# Altium PCB Banker_VHDCI_2_EDGE _BUF.PCBDOC (part 1 of 2)
Units mm, origin at the board's own origin, x right, y up, seen from the top; angles counter-clockwise.
Board outline 45 x 72.8 mm, 2 copper layers (Top, Bot), stack 1.571 mm thick; 106 components, 110 nets, 426 pads, 220 vias.
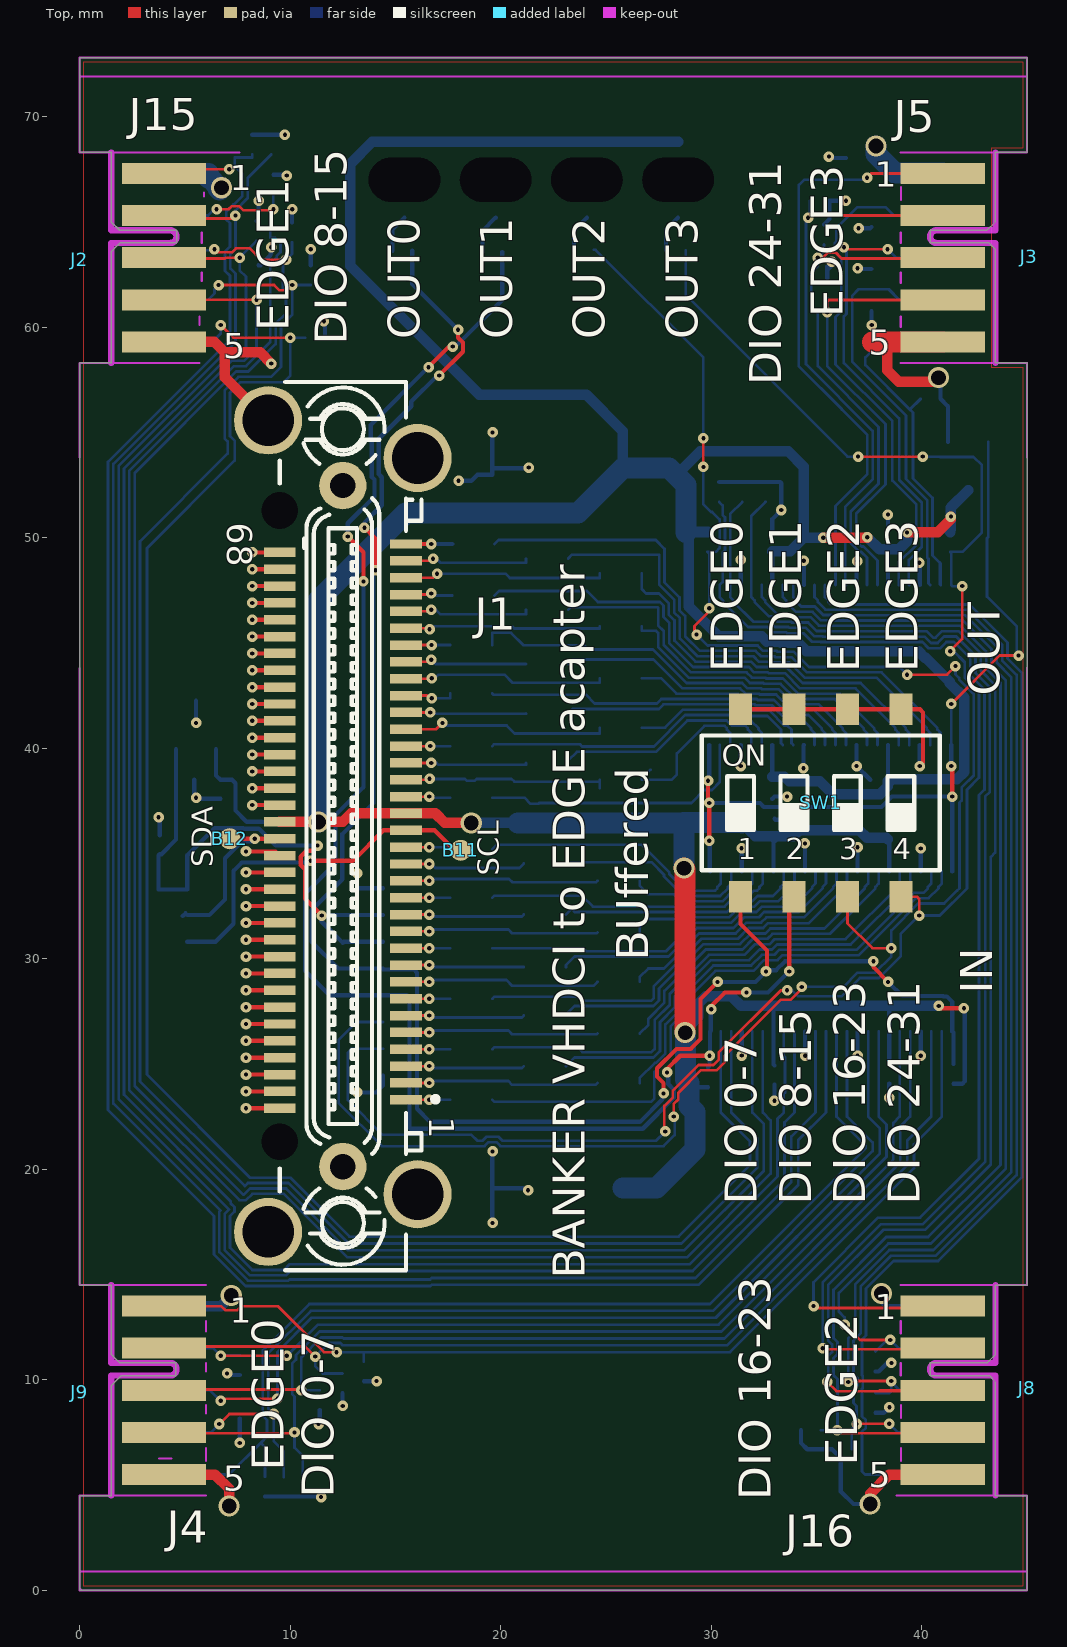
[diagram p0: Top view]
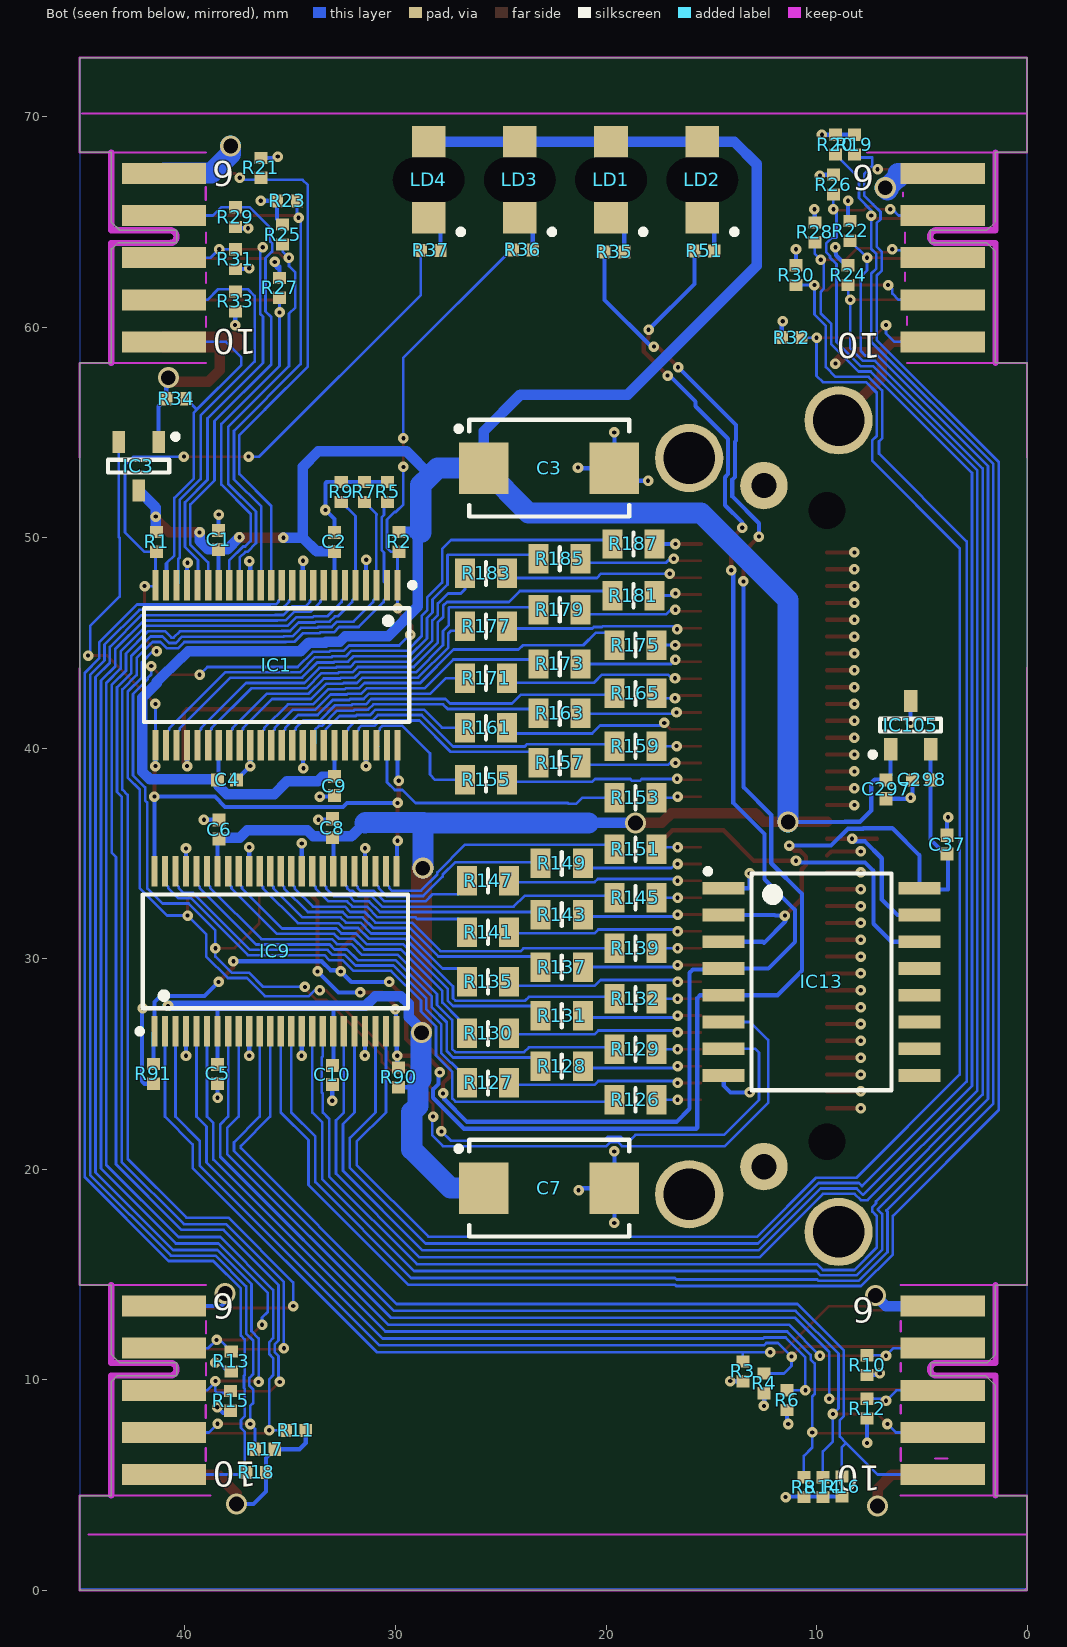
[diagram p1: Bot view, seen from below]
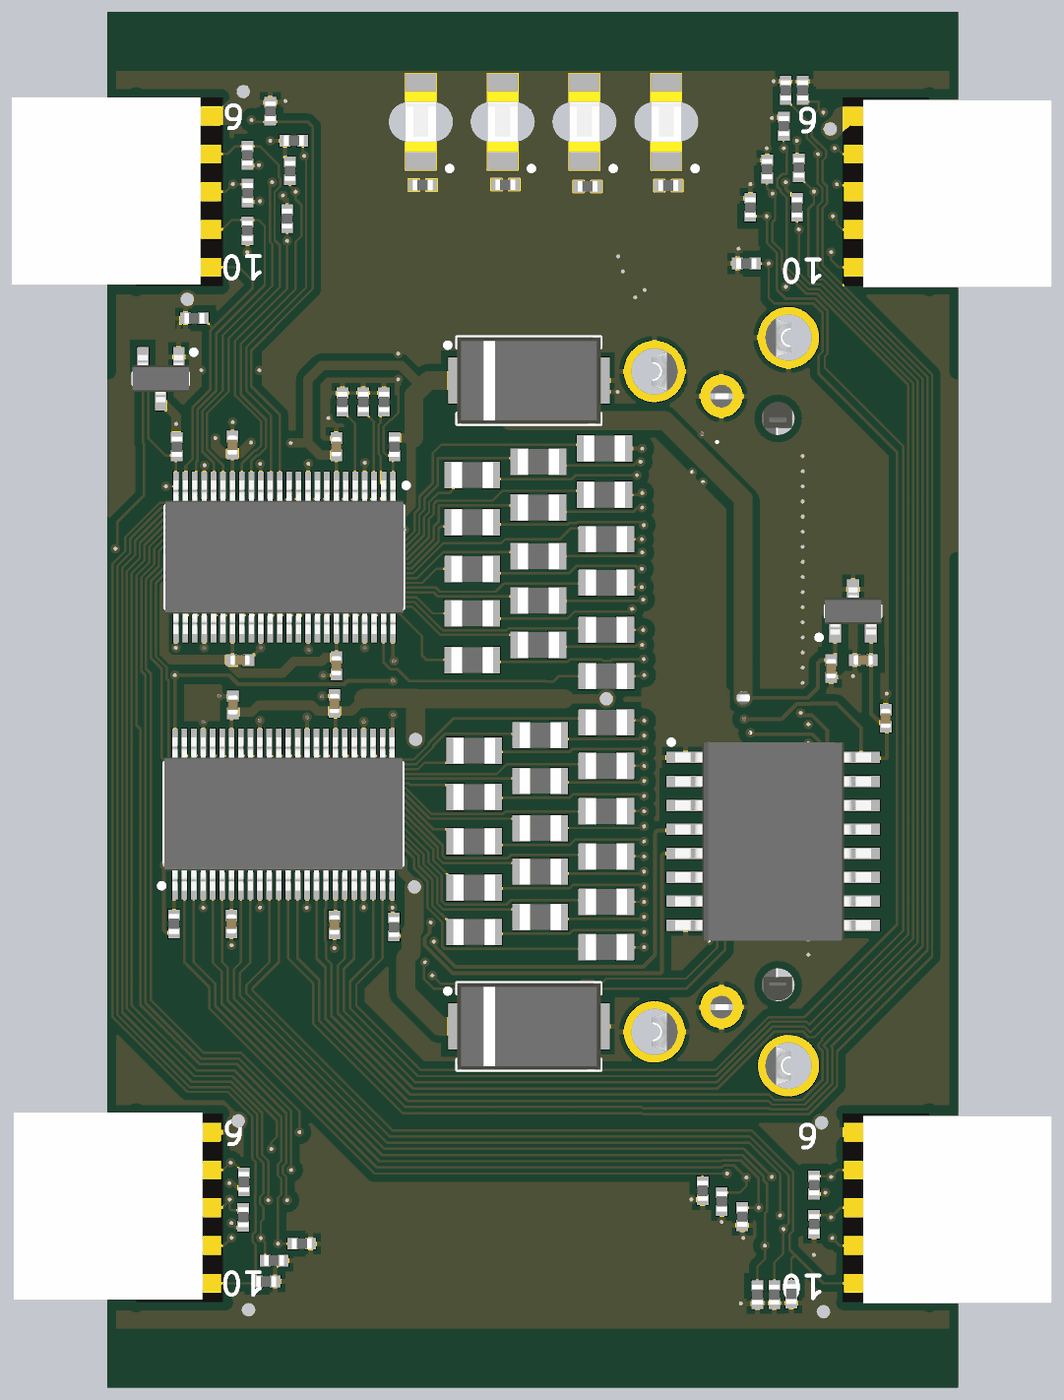
[diagram p3: 3D render of the assembled board from below, using the file's embedded part models]

## Layer stack, top to bottom
TopSolder: solder mask 0.0102, Solder Resist, Dk 3.5
Top: signal copper 0.0356
Dielectric1: core 1.5, FR-4, Dk 4.8
Bot: signal copper 0.0356
BottomSolder: solder mask 0.0102, Solder Resist, Dk 3.5

## Board outline
0,4.5 1.5,4.5 1.5,9.725 1.975,10.2 4.572,10.2 4.572,10.8 1.9,10.8 1.5,11.2 1.5,14.5 0,14.5 0,43.8 0,58.3 1.5,58.3 1.5,63.6 1.9,64 4.6,64 4.6,64.6 1.9,64.6 1.5,65 1.5,68.3 0,68.3 0,72.8 45,72.8 45,68.3 43.5,68.3 43.5,65 43.1,64.6 40.4,64.6 40.4,64 43.2,64 43.4,63.8 43.5,63.7 43.5,58.3 45,58.3 45,53.8 45,14.5 43.5,14.5 43.5,11.2 43.1,10.8 40.4,10.8 40.4,10.2 43.2,10.2 43.5,9.9 43.5,4.5 45,4.5 45,0 0,0

## Design rules (kind name [scope] priority, off if disabled: settings)
Clearance Clearance_DIFF [(InDifferentialPairClass('All Differential Pairs'))] p1: gap=0.127 ignorepadtopadclearanceinfootprint=FALSE except(0: Arc-Hole Track-Hole SMDPad-Hole THPad-Hole Via-Hole Fill-Hole Poly-Hole Region-Hole Text-Hole; 0.254: Arc-Poly Track-Poly SMDPad-Poly THPad-Poly Via-Poly Fill-Poly Poly-Poly Poly-Region Poly-Text)
Clearance [All] p2: gap=0.127 ignorepadtopadclearanceinfootprint=FALSE except(0: Arc-Hole Track-Hole SMDPad-Hole THPad-Hole Via-Hole Fill-Hole Poly-Hole Region-Hole Text-Hole; 0.381: Arc-Poly Track-Poly SMDPad-Poly THPad-Poly Via-Poly Fill-Poly Poly-Poly)
DiffPairsRouting [All] p1: maxlimit=0.254 minlimit=0.127 mostfreqgap=0.127 toplayer_minwidth=0.127 toplayer_maxwidth=0.381 toplayer_prefwidth=0.254 bottomlayer_minwidth=0.127 bottomlayer_maxwidth=0.381 bottomlayer_prefwidth=0.254 maxuncoupledlength=12.7
FabricationTestPointUsage TestPointUsage [All] p1: valid=0 allowmultiple=FALSE
FabricationTestpoint Testpoint [All] p1: side=3 testpointundercomponent=TRUE minsize=1.016 maxsize=2.54 preferedsize=1.524 minholesize=0.508 maxholesize=1.016 preferedholesize=0.813 testpointgrid=0.025 allowsidetop=TRUE allowsidebottom=TRUE usegrid=TRUE gridtolerance=0
HoleSize [All] p1: absolutevalues=TRUE maxlimit=3.81 minlimit=0.025 maxpercent=80.000 minpercent=20.000
HoleToHoleClearance [All] p1: gap=0.025 allowstackedmicrovias=TRUE
MinimumSolderMaskSliver [All] p1: minsoldermaskwidth=0
PlaneClearance [All] p1: clearance=0.254
PlaneConnect [All] p1: planeconnectstyle=Direct reliefexpansion=0.508 reliefentries=4 reliefconductorwidth=0.254 reliefairgap=0.254
PolygonConnect PolygonConnect_pad [(InPadClass('All Pads'))] p1: connectstyle=Relief reliefconductorwidth=0.254 reliefentries=4 polygonreliefangle="90 Angle" airgapwidth=0.254
PolygonConnect [All] p2: connectstyle=Direct reliefconductorwidth=0.254 reliefentries=4 polygonreliefangle="45 Angle" airgapwidth=0.254
RoomDefinition "Banker_VHDCI_2_EDGE _BUF" [InComponentClass('Banker_VHDCI_2_EDGE _BUF')] p1 off: confinementstyle=ConfineIn formatcopy=TRUE lockcomponents=FALSE outline 65.65,12.65 248.399,12.65 248.399,36.4 65.65,36.4
RoutingVias [All] p1: holewidth=0.2 width=0.5 viastyle="Through Hole" minholewidth=0.2 minwidth=0.5 maxholewidth=0.8 maxwidth=1.3
SilkToSilkClearance [All] p1: silktosilkclearance=0
SilkToSolderMaskClearance SilkscreenOverComponentPads [IsPad] p1: minsilkscreentomaskgap=0 clearancetoexposedcopper=TRUE
SolderMaskExpansion [All] p1: expansion=0.051
Width [All] p1: maxlimit=1.27 minlimit=0.127 preferedwidth=0.127
20 further rules are at their usual default settings.

## Components (designator, comment, footprint, x,y, rotation, side; value= is the part's Value field where it differs from the comment)
B11 "SMD Pad" C100 18.1,35.15 r180 top
B12 "SMD Pad" C100 7.125,35.7 r180 top
C1 "100nF" CAPC1005X55N 38.4,49.891 r270 bottom
C2 "100nF" CAPC1005X55N 32.9,49.8 r270 bottom
C3 "47uF" CAPMP7343X310N 22.7,53.3 r180 bottom
C4 "100nF" CAPC1005X55N 38,38.5 r0 bottom
C5 "100nF" CAPC1005X55N 38.45,24.53 r90 bottom
C6 "100nF" CAPC1005X55N 38.375,36.13 r270 bottom
C7 "47uF" CAPMP7343X310N 22.7,19.1 r180 bottom
C8 "100nF" CAPC1005X55N 33,36.2 r270 bottom
C9 "100nF" CAPC1005X55N 32.9,38.2 r90 bottom
C10 "100nF" CAPC1005X55N 33,24.48 r90 bottom
C37 "100nF" CAPC1005X55N 3.8,35.416 r270 bottom
C297 "1uF" CAPC1005X55N 6.691,38.05 r90 bottom
C298 "1uF" CAPC1005X55N 4.991,38.5 r180 bottom
IC1 "SN74LVCH16T245" SOP50P810X120-48N 35.65,43.95 r270 bottom locked
IC3 "MCP810T-315I/TT" SOT95P237X112-3N 42.2,53.4 r270 bottom
IC9 "SN74LVCH16T245" SOP50P810X120-48N 35.7,30.35 r90 bottom
IC13 "PCF8574ADW" SOIC127P1030X265-16N 9.761,28.902 r180 bottom
IC105 "AP7313-33SAG-7" SOT95P240X130-3N 5.531,41.1 r90 bottom
J1 "VHDCI" MOLEX_73776-0201 12.5,36.3 r270 top locked
J2 "=Family" "AVX_00 9159 010 061 916" 0,63.2 r0 top
J3 "=Family" "AVX_00 9159 010 061 916" 45.1,63.333 r0 top
J4 "=Family" EDGE10T1B6_P200W1000L0F100X400 4,13.5 r270 top
J5 "=Family" EDGE10T5B10_P200W1000L0F100X400 41,59.3 r90 top
J8 "=Family" "AVX_00 9159 010 061 916" 45,9.6 r0 top
J9 "=Family" "AVX_00 9159 010 061 916" 0,9.4 r0 top
J15 "=Family" EDGE10T1B6_P200W1000L0F100X400 4,67.3 r270 top
J16 "=Family" EDGE10T5B10_P200W1000L0F100X400 41,5.5 r90 top
LD1 "Green" LED_KINGBRIGHT_KPTR3216 19.758,67 r270 bottom
LD2 "Green" LED_KINGBRIGHT_KPTR3216 15.425,67 r270 bottom
LD3 "Green" LED_KINGBRIGHT_KPTR3216 24.092,67 r270 bottom
LD4 "Green" LED_KINGBRIGHT_KPTR3216 28.425,67 r270 bottom
R1 "10k" RESC1005X40N 41.35,49.8 r270 bottom
R2 "10k" RESC1005X40N 29.825,49.8 r270 bottom
R3 "4k7" RESC1005X40N 13.5,10.4 r270 bottom
R4 "4k7" RESC1005X40N 12.488,9.83 r270 bottom
R5 "4k7" RESC1005X40N 30.376,52.17 r90 bottom
R6 "4k7" RESC1005X40N 11.4,9.03 r270 bottom
R7 "4k7" RESC1005X40N 31.476,52.17 r90 bottom
R8 "4k7" RESC1005X40N 10.6,4.9 r270 bottom
R9 "4k7" RESC1005X40N 32.576,52.17 r90 bottom
R10 "4k7" RESC1005X40N 7.6,10.7 r270 bottom
R11 "4k7" RESC1005X40N 34.73,7.6 r180 bottom
R12 "4k7" RESC1005X40N 7.6,8.63 r270 bottom
R13 "4k7" RESC1005X40N 37.8,10.87 r270 bottom
R14 "4k7" RESC1005X40N 9.7,4.9 r270 bottom
R15 "4k7" RESC1005X40N 37.828,9 r270 bottom
R16 "4k7" RESC1005X40N 8.8,4.93 r270 bottom
R17 "4k7" RESC1005X40N 36.2,6.7 r180 bottom
R18 "4k7" RESC1005X40N 36.62,5.6 r180 bottom
R19 "4k7" RESC1005X40N 8.2,68.67 r90 bottom
R20 "4k7" RESC1005X40N 9.1,68.67 r90 bottom
R21 "4k7" RESC1005X40N 36.397,67.57 r90 bottom
R22 "4k7" RESC1005X40N 8.4,64.57 r90 bottom
R23 "4k7" RESC1005X40N 35.151,66 r0 bottom
R24 "4k7" RESC1005X40N 8.5,62.47 r90 bottom
R25 "4k7" RESC1005X40N 35.358,64.4 r90 bottom
R26 "4k7" RESC1005X40N 9.2,66.77 r90 bottom
R27 "4k7" RESC1005X40N 35.505,61.87 r90 bottom
R28 "4k7" RESC1005X40N 10.081,64.5 r90 bottom
R29 "4k7" RESC1005X40N 37.607,65.23 r270 bottom
R30 "4k7" RESC1005X40N 10.975,62.47 r90 bottom
R31 "4k7" RESC1005X40N 37.6,63.23 r270 bottom
R32 "4k7" RESC1005X40N 11.185,59.5 r0 bottom
R33 "4k7" RESC1005X40N 37.607,61.23 r270 bottom
R34 "4k7" RESC1005X40N 40.42,56.6 r0 bottom
R35 "1k" RESC1005X40N 19.6,63.575 r180 bottom
R36 "1k" RESC1005X40N 23.95,63.675 r180 bottom
R37 "1k" RESC1005X40N 28.325,63.65 r180 bottom
R51 "1k" RESC1005X40N 15.325,63.625 r180 bottom
R90 "10k" RESC1005X40N 29.849,24.363 r90 bottom
R91 "10k" RESC1005X40N 41.5,24.53 r90 bottom
R126 "39" RESC2012X60N 18.6,23.3 r180 bottom
R127 "39" RESC2012X60N 25.6,24.1 r180 bottom
R128 "39" RESC2012X60N 22.1,24.9 r180 bottom
R129 "39" RESC2012X60N 18.6,25.7 r180 bottom
R130 "39" RESC2012X60N 25.6,26.45 r180 bottom
R131 "39" RESC2012X60N 22.1,27.3 r180 bottom
R132 "39" RESC2012X60N 18.6,28.1 r180 bottom
R135 "39" RESC2012X60N 25.6,28.9 r180 bottom
R137 "39" RESC2012X60N 22.1,29.6 r180 bottom
R139 "39" RESC2012X60N 18.6,30.5 r180 bottom
R141 "39" RESC2012X60N 25.6,31.25 r180 bottom
R143 "39" RESC2012X60N 22.1,32.1 r180 bottom
R145 "39" RESC2012X60N 18.6,32.9 r180 bottom
R147 "39" RESC2012X60N 25.6,33.7 r180 bottom
R149 "39" RESC2012X60N 22.1,34.525 r180 bottom
R151 "39" RESC2012X60N 18.6,35.2 r180 bottom
R153 "39" RESC2012X60N 18.6,37.65 r180 bottom
R155 "39" RESC2012X60N 25.7,38.5 r180 bottom
R157 "39" RESC2012X60N 22.2,39.3 r180 bottom
R159 "39" RESC2012X60N 18.6,40.1 r180 bottom
R161 "39" RESC2012X60N 25.7,40.975 r180 bottom
R163 "39" RESC2012X60N 22.2,41.65 r180 bottom
R165 "39" RESC2012X60N 18.6,42.6 r180 bottom
R171 "39" RESC2012X60N 25.7,43.325 r180 bottom
R173 "39" RESC2012X60N 22.2,44 r180 bottom
R175 "39" RESC2012X60N 18.6,44.9 r180 bottom
R177 "39" RESC2012X60N 25.7,45.8 r180 bottom
R179 "39" RESC2012X60N 22.2,46.575 r180 bottom
R181 "39" RESC2012X60N 18.7,47.25 r180 bottom
R183 "39" RESC2012X60N 25.7,48.3 r180 bottom
R185 "39" RESC2012X60N 22.2,49 r180 bottom
R187 "39" RESC2012X60N 18.7,49.7 r180 bottom
SW1 "Switch" SW_OMRON_A6S-4102-H 35.2,37.4 r90 top

## Footprints (in the part's own frame and the unit in brackets; to place one, negate y for a bottom-side part, rotate by r counter-clockwise, add the part's x,y. Pads: shape width x height; smd on the part's side, far side on the other; paste and mask are expansions set on the pad)
"AVX_00 9159 010 061 916" [mm] "10 Contacts, 2mm Pitch, Open Ended Card Edge Connector, 9159 Series"
  body extent -5,-4.95 5,4.95, height 1.7
C100 [mm] "1mm Diameter SMD Pad"
  round 1 smd paste-1: 1(0,0)
CAPC1005X55N [mm] "Chip Capacitor, Body 1.0x0.55mm, IPC Medium Density"
  rect 0.62x0.62 smd: 1(-0.45,0) 2(0.45,0)
  body extent -0.52,-0.27 0.53,0.28, height 0.55
CAPMP7343X310N [mm] "Capacitor, Polarized, Molded  Body 7.3x4.3mm, IPC Medium Density"
  rect 2.35x2.45 smd: 1(-3.1,0) 2(3.1,0)
  silkscreen extent -4.43,-2.3 3.8,2.3, body extent -3.8,-2.3 3.8,2.3, height 3.1
EDGE10T1B6_P200W1000L0F100X400 [mm] "10 contacts Board Edge Connector, First Left Top Pad 1, First Left Bottom Pad 2, Pitch 2mm, Length 0mm, Width 10mm, Finger Lenght 4mm, Finger Width 1mm"
  rect 1x4 smd paste-0.5: 1(0,0) 2(2,0) 3(4,0) 4(6,0) 5(8,0)
  rect 1x4 smd far side paste-0.5: 6(0,0) 7(2,0) 8(4,0) 9(6,0) 10(8,0)
  KeepOutLayer lines w0.3: 9,-2.5 3.3,-2.5 3.3,0.3 ccw(c3,0.3) 2.7,0.3 2.7,-2.5 -1,-2.5
EDGE10T5B10_P200W1000L0F100X400 [mm] "10 contacts Board Edge Connector, First Left Top Pad 5, First Left Bottom Pad 10, Pitch 2mm, Length 0mm, Width 10mm, Finger Lenght 4mm, Finger Width 1mm"
  rect 1x4 smd paste-0.5: 1(8,0) 2(6,0) 3(4,0) 4(2,0) 5(0,0)
  rect 1x4 smd far side paste-0.5: 6(8,0) 7(6,0) 8(4,0) 9(2,0) 10(0,0)
  KeepOutLayer lines w0.3: -1,-2.5 4.7,-2.5 4.7,0.3 cw(c5,0.3) 5.3,0.3 5.3,-2.5 9,-2.5
LED_KINGBRIGHT_KPTR3216 [mm] "Reverse Mount LED 3216, Hole 2.1x2.3mm 0.35mm Height"
  rect 1.5x1.6 smd: 1(1.8,0) 2(-1.8,0)
  oval 1.9x3.2 hole 2.1 slot 3.4 at 90 deg unplated mask+0.1: 3(0,0)
  silkscreen extent 2.35,1.4 2.6,1.65, body extent -1.6,-0.8 1.6,0.8, height 0.25
MOLEX_73776-0201 [mm] "0.80mm Pitch, 68 Contacts, Ultra+ VHDCI Surface Mount Vertical Receptacle With Screwlock Kit"
  rect 0.45x1.5 smd: 1(13,3) 2(12.2,3) 3(11.4,3) 4(10.6,3) 5(9.8,3) 6(9,3) 7(8.2,3) 8(7.4,3) 9(6.6,3) 10(5.8,3) 11(5,3) 12(4.2,3) 13(3.4,3) 14(2.6,3) 15(1.8,3) 16(1,3) 17(0.2,3) 18(-0.6,3) 19(-1.4,3) 20(-2.2,3) 21(-3,3) 22(-3.8,3) 23(-4.6,3) 24(-5.4,3) 25(-6.2,3) 26(-7,3) 27(-7.8,3) 28(-8.6,3) 29(-9.4,3) 30(-10.2,3) 31(-11,3) 32(-11.8,3) 33(-12.6,3) 34(-13.4,3) 35(13.4,-3) 36(12.6,-3) 37(11.8,-3) 38(11,-3) 39(10.2,-3) 40(9.4,-3) 41(8.6,-3) 42(7.8,-3) 43(7,-3) 44(6.2,-3) 45(5.4,-3) 46(4.6,-3) 47(3.8,-3) 48(3,-3) 49(2.2,-3) 50(1.4,-3) 51(0.6,-3) 52(-0.2,-3) 53(-1,-3) 54(-1.8,-3) 55(-2.6,-3) 56(-3.4,-3) 57(-4.2,-3) 58(-5,-3) 59(-5.8,-3) 60(-6.6,-3) 61(-7.4,-3) 62(-8.2,-3) 63(-9,-3) 64(-9.8,-3) 65(-10.6,-3) 66(-11.4,-3) 67(-12.2,-3) 68(-13,-3)
  round 2.25 hole 1.2: 69(-16.175,0) 70(16.175,0)
  round 3.24 hole 2.45: 71(-19.275,-3.55) 72(-17.485,3.55) 73(19.275,-3.55) 74(17.485,3.55)
  round 0.5 hole 1.75 unplated mask+0.625: 75(-14.995,-3) 75(14.995,-3)
  silkscreen extent -21.1,-3 21.1,4.52, body extent -21.25,-3.73 21.25,3.73, height 10.7
RESC1005X40N [mm] "Chip Resistor, EIA 0402, Metric 1005, Body 1.0x0.5mm, IPC Medium Density"
  rect 0.58x0.62 smd: 1(-0.47,0) 2(0.47,0)
  body extent -0.52,-0.27 0.53,0.28, height 0.4
RESC2012X60N [mm] "Chip Resistor, EIA 0805, Metric 2012, Body 2.0x1.2mm, IPC Medium Density"
  rect 0.95x1.4 smd: 1(-1,0) 2(1,0)
  silkscreen extent 0,-0.55 0,0.55, body extent -1.1,-0.67 1.1,0.68, height 0.6
SOIC127P1030X265-16N [mm] "SOIC 16, Pitch 1.27mm - Body 7.5x10.3mm, IPC Medium Density"
  rect 2x0.6 smd: 1(-4.65,4.445) 2(-4.65,3.175) 3(-4.65,1.905) 4(-4.65,0.635) 5(-4.65,-0.635) 6(-4.65,-1.905) 7(-4.65,-3.175) 8(-4.65,-4.445) 9(4.65,-4.445) 10(4.65,-3.175) 11(4.65,-1.905) 12(4.65,-0.635) 13(4.65,0.635) 14(4.65,1.905) 15(4.65,3.175) 16(4.65,4.445)
  silkscreen extent -5.53,-5.15 3.32,5.37, body extent -5.18,-5.25 5.18,5.25, height 1.68
SOP50P810X120-48N [mm] "SOP, 48-Leads, Body 12.6x6.2mm (max), Pitch 0.50mm, IPC Medium Density"
  rect 1.45x0.3 smd: 1(-3.8,5.75) 2(-3.8,5.25) 3(-3.8,4.75) 4(-3.8,4.25) 5(-3.8,3.75) 6(-3.8,3.25) 7(-3.8,2.75) 8(-3.8,2.25) 9(-3.8,1.75) 10(-3.8,1.25) 11(-3.8,0.75) 12(-3.8,0.25) 13(-3.8,-0.25) 14(-3.8,-0.75) 15(-3.8,-1.25) 16(-3.8,-1.75) 17(-3.8,-2.25) 18(-3.8,-2.75) 19(-3.8,-3.25) 20(-3.8,-3.75) 21(-3.8,-4.25) 22(-3.8,-4.75) 23(-3.8,-5.25) 24(-3.8,-5.75) 25(3.8,-5.75) 26(3.8,-5.25) 27(3.8,-4.75) 28(3.8,-4.25) 29(3.8,-3.75) 30(3.8,-3.25) 31(3.8,-2.75) 32(3.8,-2.25) 33(3.8,-1.75) 34(3.8,-1.25) 35(3.8,-0.75) 36(3.8,-0.25) 37(3.8,0.25) 38(3.8,0.75) 39(3.8,1.25) 40(3.8,1.75) 41(3.8,2.25) 42(3.8,2.75) 43(3.8,3.25) 44(3.8,3.75) 45(3.8,4.25) 46(3.8,4.75) 47(3.8,5.25) 48(3.8,5.75)
  silkscreen extent -3.92,-6.3 2.7,6.57, body extent -4.06,-6.3 4.06,6.3, height 1.2
SOT95P237X112-3N [mm] "SOT, 0.95mm, pitch; 3 pin,1.30mm W X 2.92mm L X 1.12mm H body, IPC Medium Density"
  rect 1.05x0.6 smd: 1(-1.15,0.95) 2(-1.15,-0.95) 3(1.15,0)
  silkscreen extent -1.52,-1.45 0.3,1.87, body extent -1.25,-1.5 1.25,1.5, height 1.1
SOT95P240X130-3N [mm] "SOT23 3-Leads, Pitch 0.95mm - Body 1.3x2.9mm, IPC Medium Density"
  rect 1.05x0.65 smd: 1(-1.15,0.95) 2(-1.15,-0.95) 3(1.15,0)
  silkscreen extent -1.52,-1.45 0.3,1.92, body extent -1.25,-1.5 1.25,1.5, height 1.3
SW_OMRON_A6S-4102-H [mm] "Pitch 2.54mm, Body 11.3x6.4mm, 4 Ways SPST Surface-Mounting DIP Switch, OMRON A6S-H"
  rect 1.5x1.1 smd: 1(-4.45,3.81) 2(-4.45,1.27) 3(-4.45,-1.27) 4(-4.45,-3.81) 5(4.45,-3.81) 6(4.45,-1.27) 7(4.45,1.27) 8(4.45,3.81)
  silkscreen extent -3.2,-5.65 3.2,5.65, body extent -4.9,-5.55 4.9,5.55, height 3.97

## Part data
B11 B12: library part SMD_PAD_D1MM, "Through Hole Pad", Author="CERN DEM JLC", ComponentHeight=0mm, Component Type="Standard (No BOM)", CreateDate=10.10.2017, Family="SMD Pad", HelpURL=Undefined, LatestRevisionDate=10.10.2017, Mounted=No, PackageDescription="1mm Diameter SMD Pad", Part Description="1mm Diameter SMD Pad", Part Number=SMD_PAD_D1MM, Pin Count=1, Sense=No, SMD=No, Socket=No, Status=None
C1 C2 C4 C5 C6 C8 C9 C10 C37: library part CC0402_100NF_16V_10%_X5R, "Non-polarised capacitor", Case=0402, Manufacturer=GENERIC, Manufacturer1 ComponentHeight=0.55mm, Manufacturer1 Example=MURATA, Manufacturer1 Part Number=GRM155R61C104KA88D, Tolerance=±10%, Voltage=16V, Author="CERN DEM JLC", Component Type=Standard, CreateDate=10.12.2013, HelpURL=\\cern.ch\dfs\Applications\Altium\Datasheets\CC0402_X5R_MURATA_GRM.pdf, LatestRevisionDate=10.12.2013, Manufacturer Part Number=CC0402_100NF_16V_10%_X5R, Mounted=Yes, Part Description="SMD Multilayer Chip Ceramic Capacitor", Part Number=CC0402_100NF_16V_10%_X5R, Pin Count=2, Sense=No, SMD=Yes, Socket=No, Status=None, TC=X5R
C3 C7: library part CTE7343-31_47UF_25V_10%, "Polarised capacitor", Case=D, Manufacturer=GENERIC, Manufacturer1 ComponentHeight=3.1mm, Manufacturer1 Example=AVX, Manufacturer1 Part Number=TAJD476K025R, Tolerance=±10%, Voltage=25V, Author="CERN DEM JLC", Component Type=Standard, CreateDate=03/12/2007, HelpURL=\\cern.ch\dfs\Applications\Altium\Datasheets\CTE_AVX_TAJ.pdf, LatestRevisionDate=03/12/2007, Manufacturer Part Number=CTE7343-31_47UF_25V_10%, Mounted=Yes, Part Description="Solid Tantalum Chip Capacitor", Part Number=CTE7343-31_47UF_25V_10%, Pin Count=2, Sense=No, SMD=Yes, Socket=No, Status=Preferred
C297 C298: library part CC0402_1UF_16V_10%_X5R, "Non-polarised capacitor", Case=0402, Manufacturer=GENERIC, Manufacturer1 ComponentHeight=0.55mm, Manufacturer1 Example=TDK, Manufacturer1 Part Number=C1005X5R1C105KT, Tolerance=±10%, Voltage=16V, Author="CERN DEM JLC", Component Type=Standard, CreateDate=25.10.2012, HelpURL=\\cern.ch\dfs\Applications\Altium\Datasheets\CC0402_X5R_TDK_C.pdf, LatestRevisionDate=25.10.2012, Manufacturer Part Number=CC0402_1UF_16V_10%_X5R, Mounted=Yes, Part Description="SMD Multilayer Chip Ceramic Capacitor", Part Number=CC0402_1UF_16V_10%_X5R, Pin Count=2, Sense=No, SMD=Yes, Socket=No, Status=Preferred, TC=X5R
IC1 IC9: "16-Bit Dual-Supply Bus Transceiver With Configurable Voltage Translation And 3-State Outputs", Case=TSSOP48, Manufacturer="TEXAS INSTRUMENTS", Manufacturer Part Number=SN74LVCH16T245DGGR, Author=GK, Bonding=No, ComponentHeight=1.2mm, Component Type=Standard, CreateDate=09/02/2016, Device=SN74LVCH16T245, HelpURL=\\cern.ch\dfs\Applications\Altium\Datasheets\CLVCH16T245MDGGREP.pdf, LatestRevisionDate=09/02/2016, Mounted=Yes, PackageDescription="SOP, 48-Leads, Body 12.6x6.2mm (max), Pitch 0.50mm, IPC Medium Density", Part Description="16-Bit Dual-Supply Bus Transceivers With Configurable Voltage Translation And 3-State Outputs", Part Number=SN74LVCH16T245DGGR, Pin Count=48, PressFit=No, Sense=No, SMD=Yes, Socket=No
IC3: "3.075V Microcontroller Supervisory Circuit With Push-Pull Output", Case=SOT23, Manufacturer="MICROCHIP TECHNOLOGY", Author=GK, Bonding=No, ComponentHeight=1.12mm, Component Type=Standard, CreateDate=16.06.2011, Device=MCP810T-315I/TT, HelpURL=\\cern.ch\dfs\Applications\Altium\Datasheets\MCP809T-315I-TT.pdf, LatestRevisionDate=16.06.2011, Manufacturer Part Number=MCP810T-315I/TT, Mounted=Yes, PackageDescription="SOT, 0.95mm, pitch; 3 pin,1.30mm W X 2.92mm L X 1.12mm H body, IPC Medium Density", Part Description="3.075V Microcontroller Supervisory Circuit With Push-Pull Output", Part Number=MCP810T-315I/TT, Pin Count=3, PressFit=No, Sense=No, SMD=Yes, Socket=No
IC13: "Remote 8-bit I/O Expander For I2C Bus", Case=SOIC16W, Manufacturer="TEXAS INSTRUMENTS", Author="CERN DEM JLC", Bonding=No, ComponentHeight=2.65mm, Component Type=Standard, CreateDate=01.11.2012, Device=PCF8574ADW, HelpURL=\\cern.ch\dfs\Applications\Altium\Datasheets\PCF8574ADW.pdf, LatestRevisionDate=01.11.2012, Manufacturer Part Number=PCF8574ADW, Mounted=Yes, PackageDescription="SOIC 16, Pitch 1.27mm - Body 7.5x10.3mm, IPC Medium Density", Part Description="Remote 8-bit I/O Expander For I2C Bus", Part Number=PCF8574ADW, Pin Count=16, PressFit=No, Sense=No, SMD=Yes, Socket=No
IC105: "3-Terminal Regulator 1=IN 2=OUT 3=GND", Case=SOT23, Manufacturer="DIODES INCORPORATED", Author="CERN DEM JLC", Bonding=No, ComponentHeight=1.35mm, Component Type=Standard, CreateDate=20.03.2018, Device=AP7313-33SAG-7, HelpURL=\\cern.ch\dfs\Applications\Altium\Datasheets\AP7313-33SAG-7.pdf, LatestRevisionDate=20.03.2018, Manufacturer Part Number=AP7313-33SAG-7, Mounted=Yes, PackageDescription="SOT23 3-Leads, Pitch 0.95mm - Body 1.3x2.9mm, IPC Medium Density", Part Description="3.3V, 150mA Low Quiescent Current, Fast Transient Low Dropout Linear Regulator", Part Number=AP7313-33SAG-7, Pin Count=3, PressFit=No, Sense=No, SMD=Yes, Socket=No
J1: library part MOLEX_73776-0201, "0.80mm Pitch, 68 Contacts, Ultra+ VHDCI Surface Mount Vertical Receptacle", Manufacturer=MOLEX, Manufacturer Part Number=73776-0201, Author="CERN DEM JLC", ComponentHeight=10.7mm, Component Type=Standard, CreateDate=14/01/2013, Family=VHDCI, HelpURL=\\cern.ch\dfs\Applications\Altium\Datasheets\MOLEX_73776-0201.pdf, LatestRevisionDate=14/01/2013, Mounted=Yes, Part Description="0.80mm Pitch, 68 Contacts, Ultra+ VHDCI Surface Mount Vertical Receptacle With Screwlock Kit", Part Number=MOLEX_73776-0201, Pin Count=74, PressFit=No, Sense=No, SMD=Yes, Socket=No, Status=None
J2 J3 J8 J9: library part "AVX_00 9159 010 061 916", "Open Ended Card Edge Connector, 9159 Series", Manufacturer=AVX, Manufacturer Part Number="00 9159 010 061 916", Author="CERN DEM MR", ComponentHeight=1.6mm, Component Type=Standard, CreateDate=13.02.2018, HelpURL="\\cern.ch\dfs\Applications\Altium\Datasheets\AVX_00 9159 010 061 916.pdf", LatestRevisionDate=13.02.2018, Mounted=Yes, Part Description="10 Contacts, 2mm Pitch, Open Ended Card Edge Connector, 9159 Series", Part Number="AVX_00 9159 010 061 916", Pin Count=10, PressFit=No, Sense=No, SMD=No, Socket=No, Status=None
J4 J15: library part EDGE10T1B6_P200W1000L0F100X400, "PCB Edge Connector 10 (2x5)", Author="CERN DEM MR", ComponentHeight=0mm, Component Type="Standard (No BOM)", CreateDate=14.02.2018, HelpURL=\\cern.ch\dfs\Applications\Altium\Datasheets\EDGE10T1B6_P200W1000L0F100X400.pdf, LatestRevisionDate=14.02.2018, Mounted=No, Part Description="10 Contacts Board Edge Connector, Pitch 2mm, Length 0mm, Width 10mm, Finger Lenght 4mm, Finger Width 1mm", Part Number=EDGE10T1B6_P200W1000L0F100X400, Pin Count=10, PressFit=No, Sense=No, SMD=No, Socket=No, Status=None
J5 J16: library part EDGE10T5B10_P200W1000L0F100X400, "PCB Edge Connector 10 (2x5)", Author="CERN DEM MR", ComponentHeight=0mm, Component Type="Standard (No BOM)", CreateDate=14.02.2018, HelpURL=\\cern.ch\dfs\Applications\Altium\Datasheets\EDGE10T5B10_P200W1000L0F100X400.pdf, LatestRevisionDate=14.02.2018, Mounted=No, Part Description="10 Contacts Board Edge Connector, Pitch 2mm, Length 0mm, Width 10mm, Finger Lenght 4mm, Finger Width 1mm", Part Number=EDGE10T5B10_P200W1000L0F100X400, Pin Count=10, PressFit=No, Sense=No, SMD=No, Socket=No, Status=None
LD1 LD2 LD3 LD4: library part LED_KINGBRIGHT_KPTR-3216CGCK, "LED Green 1A 2C", Manufacturer=KINGBRIGHT, Manufacturer Part Number=KPTR-3216CGCK, Author="CERN DEM MR", Bonding=No, Color=Green, ComponentHeight=0.35mm, Component Type=Standard, CreateDate=15.02.2016, HelpURL=\\cern.ch\dfs\Applications\Altium\Datasheets\LED_KINGBRIGHT_KPTR-3216CGCK.pdf, LatestRevisionDate=15.02.2016, Mounted=Yes, PackageDescription="Reverse Mount LED 3216, Hole 2.1x2.3mm 0.35mm Height", Part Description="Reverse Mount LED 1.4x1.6mm Green", Part Number=LED_KINGBRIGHT_KPTR-3216CGCK, Pin Count=2, PressFit=No, Sense=No, SMD=Yes, Socket=No
R1 R2 R90 R91: library part R0402_10K_1%_0.0625W_100PPM, "Resistor - 1%", Case=0402, Manufacturer=GENERIC, Manufacturer1 ComponentHeight=0.4mm, Manufacturer1 Example="YAGEO PHYCOMP", Manufacturer1 Part Number=232270671003L, Power=0.0625W, Tolerance=±1%, Author="CERN DEM JLC", Component Type=Standard, CreateDate=03/12/2007, HelpURL=\\cern.ch\dfs\Applications\Altium\Datasheets\R0402_Phycomp_RC0402.pdf, LatestRevisionDate=17/10/2012, Manufacturer Part Number=R0402_10K_1%_0.0625W_100PPM, Mounted=Yes, Part Description="General Purpose Thick Film Chip Resistor", Part Number=R0402_10K_1%_0.0625W_100PPM, Pin Count=2, PressFit=No, Sense=No, SMD=Yes, Socket=No, Status="Not Recommended", TC=±100ppm/°C
R3 R4 R5 R6 R7 R8 R9 R10 R11 R12 R13 R14 R15 R16 R17 R18 R19 R20 R21 R22 R23 R24 R25 R26 R27 R28 R29 R30 R31 R32 R33 R34: library part R0402_4K7_1%_0.0625W_100PPM, "Resistor - 1%", Case=0402, Manufacturer=GENERIC, Manufacturer1 ComponentHeight=0.4mm, Manufacturer1 Example="YAGEO PHYCOMP", Manufacturer1 Part Number=232270674702L, Power=0.0625W, Tolerance=±1%, Author="CERN DEM JLC", Component Type=Standard, CreateDate=03/12/2007, HelpURL=\\cern.ch\dfs\Applications\Altium\Datasheets\R0402_Phycomp_RC0402.pdf, LatestRevisionDate=17/10/2012, Manufacturer Part Number=R0402_4K7_1%_0.0625W_100PPM, Mounted=Yes, Part Description="General Purpose Thick Film Chip Resistor", Part Number=R0402_4K7_1%_0.0625W_100PPM, Pin Count=2, PressFit=No, Sense=No, SMD=Yes, Socket=No, Status="Not Recommended", TC=±100ppm/°C
R35 R36 R37 R51: library part R0402_1K_1%_0.0625W_100PPM, "Resistor - 1%", Case=0402, Manufacturer=GENERIC, Manufacturer1 ComponentHeight=0.4mm, Manufacturer1 Example="YAGEO PHYCOMP", Manufacturer1 Part Number=232270671002L, Power=0.0625W, Tolerance=±1%, Author="CERN DEM JLC", Component Type=Standard, CreateDate=03.12.2007, HelpURL=\\cern.ch\dfs\Applications\Altium\Datasheets\R0402_Phycomp_RC0402.pdf, LatestRevisionDate=17.10.2012, Manufacturer Part Number=R0402_1K_1%_0.0625W_100PPM, Mounted=Yes, Part Description="General Purpose Thick Film Chip Resistor", Part Number=R0402_1K_1%_0.0625W_100PPM, Pin Count=2, PressFit=No, Sense=No, SMD=Yes, Socket=No, Status="Not Recommended", TC=±100ppm/°C
R126 R127 R128 R129 R130 R131 R132 R135 R137 R139 R141 R143 R145 R147 R149 R151 R153 R155 R157 R159 R161 R163 R165 R171 R173 R175 R177 R179 R181 R183 R185 R187: library part R0805_39R_1%_0.125W_100PPM, "Resistor - 1%", Case=0805, Manufacturer=GENERIC, Manufacturer1 ComponentHeight=0.6mm, Manufacturer1 Example="NIC COMPONENT", Manufacturer1 Part Number=NRC10F39R0TRF, Power=0.125W, Tolerance=±1%, Author="CERN DEM JLC", Component Type=Standard, CreateDate=03/12/2007, HelpURL=\\cern.ch\dfs\Applications\Altium\Datasheets\R0805_NIC_NRC.pdf, LatestRevisionDate=13/03/2008, Manufacturer Part Number=R0805_39R_1%_0.125W_100PPM, Mounted=Yes, Part Description="General Purpose Thick Film Chip Resistor", Part Number=R0805_39R_1%_0.125W_100PPM, Pin Count=2, PressFit=No, Sense=No, SMD=Yes, Socket=No, Status=Preferred, TC=±100ppm/°C
SW1: library part SW_OMRON_A6S-4102-H, "4 Ways SPST DIP Switch", Manufacturer=OMRON, Manufacturer Part Number=A6S-4102-H, Author="CERN DEM JMW", ComponentHeight=3.8mm, Component Type=Standard, CreateDate=25/09/2008, Family=Switch, HelpURL=\\cern.ch\dfs\Applications\Altium\Datasheets\SW_OMRON_A6S-4102-H.pdf, LatestRevisionDate=25/09/2008, Mounted=Yes, PackageDescription="Pitch 2.54mm, Body 11.3x6.4mm, 4 Ways SPST Surface-Mounting DIP Switch, OMRON A6S-H", Part Description="4 Ways SPST DIP Switch, White Flat Actuator with Seal Tape, Contact Rating 25mA 24VDC", Part Number=SW_OMRON_A6S-4102-H, Pin Count=8, PressFit=No, Sense=No, SMD=Yes, Socket=No, Status=None

## Via types
v1: diameter 0.5, hole 0.2, Top to Bot, tented both sides, 209 vias
v2: diameter 1, hole 0.7, Top to Bot, tented both sides, 11 vias

## Nets (pads, with @x,y where several pads share a name; then routed paths per layer and width w, separated by ;. In a path a pad name is that pad's centre, name@x,y a point inside that pad or via, vN(x,y) a via of type N, cw(c..) or ccw(c..) an arc to the next point about the centre after c; other vN are vias at no path point)
DIR_CTRL0: IC9.1 IC13.4 R51.1 R91.2 SW1.1 | length 88.7
  Top w0.2: v1(13.525,50.475) 14.05,49.95 v1(14.05,48.45) ; v1(17.076,57.703) 18.202,58.829 18.202,59.273 17.975,59.5 v1(17.975,59.875) ; v1(27.736,23.6) 27.736,24.089 27.423,24.402 27.423,24.798 28.343,25.717 29.021,25.717 29.49,26.186 29.49,28.09 v1(30.3,28.9) ; SW1.1@31.39,32.95 31.39,31.649 32.648,30.391 32.648,29.448 v1(32.6,29.4) ; v1(37.7,29.877) 37.7,29.6 v1(38.4,28.9)
  Bot w0.2: v1(13.525,50.475) 13.525,50.714 14.35,51.539 14.35,52.873 14.203,53.02 14.203,54.697 15.75,56.244 15.75,56.461 16.992,57.703 v1(17.076,57.703) ; v1(14.05,48.45) 13.952,48.352 13.952,37.402 12.475,35.925 12.475,33.775 11.023,32.323 11.023,30.802 12.288,29.537 IC13.4@14.411,29.537 14.411,29.489 14.415,29.485 15.876,29.485 16.027,29.334 16.027,22.873 16.648,22.252 26.607,22.252 27.679,23.324 27.679,23.543 v1(27.736,23.6) ; R51.1@15.795,63.625 15.795,62.055 v1(17.975,59.875) ; v1(30.3,28.9) 32.1,28.9 v1(32.6,29.4) 32.657,29.457 33.083,29.457 33.502,29.877 v1(37.7,29.877) ; v1(38.4,28.9) 38.404,28.9 39.071,28.233 41.003,28.233 41.035,28.2 41.19,28.2 41.45,27.94 IC9.1@41.45,26.55 41.5,26.5 R91.2@41.5,25
DIR_CTRL1: IC9.24 IC13.5 R35.1 R90.2 SW1.2 | length 78.6
  Top w0.2: v1(12.735,50.05) 13.475,49.31 v1(13.475,47.925) ; v1(16.575,58.1) 17.55,59.075 v1(17.725,59.075) ; v1(27.9,24.6) 27.9,24.765 28.525,25.39 v1(29.919,25.39) ; v1(30,27.6) 30,27.756 30.644,28.4 v1(31.669,28.4) ; v1(33.7,29.4) 33.7,32.72 SW1.2@33.93,32.95
  Bot w0.2: v1(12.735,50.05) 12.735,50.685 14,51.95 14,52.761 13.876,52.885 13.876,54.562 13.823,54.615 13.823,55.348 v1(16.575,58.1) ; v1(13.475,47.925) 13.475,38.15 12.148,36.823 12.148,34.535 10.696,33.083 10.696,29.429 11.858,28.267 IC13.5@14.411,28.267 15.534,28.267 15.661,28.139 15.661,21.977 15.713,21.925 26.743,21.925 28.213,23.396 28.213,23.798 27.957,24.054 27.957,24.543 v1(27.9,24.6) ; v1(17.725,59.075) 17.85,59.075 20.07,61.295 R35.1@20.07,63.575 ; R90.2@29.849,24.833 29.919,24.903 v1(29.919,25.39) 29.935,25.406 29.935,26.535 IC9.24@29.95,26.55 29.975,26.575 29.975,27.575 v1(30,27.6) ; v1(31.669,28.4) 32.7,28.4 v1(33.7,29.4)
DIR_CTRL2: IC1.1 IC13.6 R2.2 R36.1 SW1.3 | length 93.1
  Top w0.127: v1(28.213,22.5) 28.213,23.095 28.431,23.312 28.431,23.631 29.496,24.696 30.246,24.696 30.644,25.094 30.644,25.394 33.31,28.059 33.782,28.059 34.3,28.577 v1(34.3,28.664) ; v1(29.3,45.4) 29.2,45.5 29.2,45.8 29.9,46.5 v1(29.9,46.65) ; v1(29.625,53.359) v1(29.625,54.725) ; SW1.3@36.47,32.95 36.47,31.68 37.65,30.5 v1(38.553,30.5) ; v1(39.304,43.491) 41.2,43.491 41.6,43.891 v1(41.6,43.9)
  Bot w0.127: IC13.6@14.411,26.997 13.155,26.997 12.3,26.141 12.3,23.154 14.354,21.1 19.236,21.1 19.427,21.29 19.792,21.29 19.982,21.1 27.741,21.1 28.259,21.618 28.259,22.454 v1(28.213,22.5) ; R36.1@24.42,63.675 24.5,63.675 29.625,58.55 v1(29.625,54.725) ; v1(29.3,45.4) 29.824,44.876 32.207,44.876 32.461,44.622 33.102,44.622 33.144,44.58 33.925,44.58 34.645,43.86 38.935,43.86 v1(39.304,43.491) ; v1(29.625,53.359) 29.625,51.581 29.987,51.22 30.042,51.22 30.4,50.861 30.4,49.509 30.221,49.33 R2.2@29.825,49.33 29.9,49.255 IC1.1@29.9,47.75 v1(29.9,46.65) ; v1(34.3,28.664) 36.281,28.664 36.954,29.336 37.782,29.336 38.553,30.107 v1(38.553,30.5) 38.553,31.351 39.826,32.625 41.065,32.625 41.675,33.235 41.679,33.235 41.791,33.346 41.791,37.418 41.891,37.518 41.891,38.131 42.467,38.708 42.467,42.577 41.774,43.271 41.774,43.335 41.6,43.509 v1(41.6,43.9)
DIR_CTRL3: IC1.24 IC13.7 R1.2 R37.1 SW1.4 | length 85.3
  Top w0.127: v1(27.819,21.8) 27.773,21.846 27.773,23.014 28.177,23.418 28.177,23.736 29.391,24.95 30.102,24.95 30.36,25.208 30.36,25.56 33.3,28.5 v1(33.6,28.5) ; v1(36.975,53.85) v1(40.05,53.85) ; SW1.4@39.01,32.95 39.771,32.95 39.875,32.846 v1(39.875,32.05) ; v1(41.35,44.608) 41.92,45.178 v1(41.92,47.7)
  Bot w0.127: IC13.7@14.411,25.727 12.921,25.727 12.735,25.54 12.735,23.289 14.389,21.635 18.605,21.635 18.886,21.354 19.131,21.354 19.322,21.544 19.897,21.544 20.088,21.354 27.373,21.354 v1(27.819,21.8) ; R37.1@28.795,63.65 28.795,61.525 36.47,53.85 v1(36.975,53.85) ; v1(33.6,28.5) 33.841,28.5 34.118,28.223 36.2,28.223 37.059,29.082 37.959,29.082 38.994,30.117 38.994,31.169 v1(39.875,32.05) 40.854,32.05 42.145,33.341 42.145,38.026 42.721,38.603 42.721,42.682 42.04,43.363 42.04,44.082 41.514,44.608 v1(41.35,44.608) ; v1(40.05,53.85) 40.856,53.85 40.871,53.834 42.458,53.834 42.85,53.442 42.85,50.25 41.93,49.33 R1.2@41.35,49.33 41.4,49.28 IC1.24@41.4,47.75 41.45,47.7 v1(41.92,47.7)
EDGE0_DIO0: IC9.2 J4.1 R3.1 | length 47.8
  Top w0.127: J4.1@4,13.5 6.723,13.5 6.914,13.309 7.486,13.309 7.677,13.5 9.408,13.5 11.597,11.311 v1(12.2,11.311)
  Bot w0.127: v1(12.2,11.311) 13.5,11.311 ; R3.1@13.5,10.87 13.5,11.311 ; IC9.2@40.95,26.55 40.95,22.5 39.631,21.181 39.631,20.052 30.89,11.311 13.5,11.311
EDGE0_DIO1: IC9.3 J4.2 R4.1 | length 48.1
  Top w0.127: J4.2@4,11.5 4.079,11.579 10.706,11.579 v1(11.185,11.1)
  Bot w0.127: R4.1@12.488,10.3 11.547,10.3 11.185,10.662 v1(11.185,11.1) 11.836,11.752 12.382,11.752 12.496,11.638 30.755,11.638 39.304,20.187 39.304,21.354 40.45,22.5 IC9.3@40.45,26.55
EDGE0_DIO2: IC9.5 J4.3 R6.1 | length 47.7
  Top w0.127: J4.3@4,9.5 4.04,9.54 10.49,9.54 v1(10.53,9.5)
  Bot w0.127: R6.1@11.4,9.5 v1(10.53,9.5) 10.531,11.069 11.467,12.006 12.488,12.006 12.528,11.965 30.619,11.965 38.977,20.323 38.977,22.027 39.45,22.5 IC9.5@39.45,26.55
EDGE0_DIO3: IC9.6 J4.4 R8.1 | length 50.8
  Top w0.127: J4.4@4,7.5 4.041,7.459 10.163,7.459 v1(10.203,7.5)
  Bot w0.127: R8.1@10.6,5.37 10.6,6.376 10.203,6.773 v1(10.203,7.5) 10.204,9.204 10.09,9.318 10.09,10.77 10.276,10.956 10.276,11.174 11.395,12.292 30.484,12.292 38.65,20.458 38.65,22.2 38.95,22.5 38.95,23.691 38.951,25.369 IC9.6@38.95,26.55
EDGE0_DIO4: IC9.8 J4.7 R10.1 | length 45.6
  Top w0.127: v1(6.7,11.139) v1(9.836,11.139)
  Bot w0.127: J4.7@4.141,11.36 J4.7@4,11.5 6.339,11.5 v1(6.7,11.139) 6.731,11.17 R10.1@7.6,11.17 ; v1(9.836,11.139) 11.316,12.619 30.348,12.619 38.323,20.594 38.323,22.127 37.95,22.5 37.95,23.691 37.95,25.369 IC9.8@37.95,26.55
EDGE0_DIO5: IC9.9 J4.8 R12.1 | length 47.5
  Top w0.127: v1(6.7,9) 6.8,9.1 v1(9.395,9.1)
  Bot w0.127: J4.8@4.141,9.36 J4.8@4,9.5 6.2,9.5 v1(6.7,9) 6.8,9.1 R12.1@7.6,9.1 ; v1(9.395,9.1) 9.395,11.321 11.02,12.946 30.213,12.946 37.996,20.729 37.996,21.954 37.45,22.5 IC9.9@37.45,26.55
EDGE0_DIO6: IC9.11 J4.9 R14.1 | length 50.9
  Top w0.127: v1(6.631,7.9) 7.107,8.375 v1(9.223,8.375)
  Bot w0.127: J4.9@4.141,7.359 J4.9@4,7.5 6.232,7.5 v1(6.631,7.9) ; R14.1@9.7,5.37 9.7,6.6 9.223,7.078 v1(9.223,8.375) 8.955,8.643 8.955,11.24 10.988,13.273 30.077,13.273 37.669,20.865 37.669,21.281 36.45,22.5 IC9.11@36.45,26.55
EDGE0_DIO7: IC9.12 J4.10 R16.1 | length 50.2
  Bot w0.127: J4.10@4,5.5 7.1,5.5 8.6,7 ; R16.1@8.8,5.4 8.8,6.8 8.6,7 ; IC9.12@35.95,26.55 35.95,22.5 37.342,21.108 37.342,21 29.942,13.6 10.91,13.6 8.701,11.391 8.701,8.274 8.896,8.079 8.896,7.296 8.6,7
EDGE1_DIO0: IC9.13 J15.1 R19.1 | length 99.7
  Top w0.127: J15.1@4,67.3 4.2,67.5 v1(7.1,67.5)
  Bot w0.127: R19.1@8.2,68.2 8.2,68.06 7.36,68.06 7.36,67.655 7.729,67.286 7.729,66.237 7.324,65.832 7.31,65.832 6.96,65.482 6.96,65.118 7.14,64.937 7.14,63.823 6.905,63.588 6.905,62.676 7.14,62.441 7.14,59.4 1.345,53.605 1.345,22.814 6.377,17.781 6.377,15.96 7.884,14.453 16.664,14.453 16.723,14.511 29.39,14.511 34.131,19.252 34.131,21.381 35.45,22.7 IC9.13@35.45,26.55
EDGE1_DIO1: IC9.14 J15.2 R20.1 | length 98.4
  Top w0.127: J15.2@4,65.3 4.141,65.159 7.259,65.159 v1(7.4,65.3)
  Bot w0.127: R20.1@9.1,68.2 7.983,67.083 7.983,66.132 7.4,65.549 v1(7.4,65.3) 7.4,63.723 7.159,63.482 7.159,62.781 7.4,62.541 7.4,59.301 1.599,53.499 1.599,23.127 6.686,18.04 6.631,17.986 6.631,16.065 7.99,14.707 9.91,14.707 9.969,14.765 16.65,14.765 16.723,14.838 29.255,14.838 33.804,19.387 33.804,21.554 34.95,22.7 IC9.14@34.95,26.55
EDGE1_DIO2: IC9.16 J15.3 R22.1 | length 93.3
  Top w0.127: J15.3@4,63.3 4.04,63.26 6.9,63.26 6.94,63.3 v1(7.6,63.3)
  Bot w0.127: R22.1@8.4,64.1 v1(7.6,63.3) 7.6,62.7 7.9,62.4 7.9,58.865 7.691,58.656 7.114,58.656 1.853,53.394 1.853,23.335 7.096,18.091 6.885,17.88 6.885,16.17 8.095,14.961 9.805,14.961 10.009,15.165 29.119,15.165 33.477,19.523 33.477,22.227 33.95,22.7 IC9.16@33.95,26.55
EDGE1_DIO3: IC9.17 J15.4 R24.1 | length 90.7
  Top w0.127: J15.4@4,61.3 v1(8.4,61.3)
  Bot w0.127: R24.1@8.5,62 8.5,61.4 v1(8.4,61.3) 8.4,59.005 7.796,58.402 7.219,58.402 2.107,53.289 2.107,23.543 7.175,18.475 7.175,18.372 7.35,18.197 7.35,17.986 7.139,17.775 7.139,16.275 8.2,15.215 9.7,15.215 9.977,15.492 28.984,15.492 33.15,19.658 33.15,22.4 33.45,22.7 33.45,23.591 33.5,23.641 33.5,25.319 33.45,25.37 IC9.17@33.45,26.55
EDGE1_DIO4: IC9.19 J15.7 R26.1 | length 94.3
  Top w0.127: v1(6.5,65.6) 7.077,65.6 7.218,65.74 7.582,65.74 7.777,65.546 9.146,65.546 v1(9.2,65.6)
  Bot w0.127: J15.7@4,65.3 6.1,65.3 6.4,65.6 v1(6.5,65.6) ; R26.1@9.2,66.3 v1(9.2,65.6) 9.052,65.452 9.052,64.259 9.07,64.24 9.282,64.24 9.54,63.982 9.54,63.563 9.36,63.382 9.36,63.297 9.052,62.989 9.052,59.298 7.901,58.148 7.325,58.148 2.361,53.184 2.361,23.752 7.582,18.531 7.895,18.531 8.2,18.836 9.7,18.836 12.717,15.819 28.848,15.819 32.823,19.794 32.823,22.327 32.45,22.7 IC9.19@32.45,26.55
EDGE1_DIO5: IC9.20 J15.8 R28.1 | length 91.7
  Top w0.127: v1(6.4,63.7) 6.546,63.554 7.231,63.554 7.418,63.741 8.082,63.741 8.623,63.2 v1(9.8,63.2)
  Bot w0.127: J15.8@4,63.3 4.347,63.647 6.347,63.647 v1(6.4,63.7) ; R28.1@10.081,64.03 10.081,63.481 v1(9.8,63.2) 9.66,63.06 9.66,61.818 9.8,61.677 9.8,60.659 9.306,60.165 9.306,59.193 8.007,57.894 7.43,57.894 2.615,53.079 2.615,23.96 7.79,18.785 8.095,19.09 9.805,19.09 12.749,16.146 28.713,16.146 32.496,19.929 32.496,22.154 31.95,22.7 IC9.20@31.95,26.55
EDGE1_DIO6: IC9.22 J15.9 R30.1 | length 90.5
  Top w0.127: v1(6.6,62) 9.241,62 9.495,61.746 9.705,61.746 9.959,62 v1(10.1,62)
  Bot w0.127: J15.9@4,61.3 6.1,61.3 6.4,61.6 6.4,61.8 v1(6.6,62) ; R30.1@10.975,62 v1(10.1,62) 10.1,60.6 9.56,60.06 9.56,58.107 9.093,57.64 7.535,57.64 6.885,56.99 6.885,54.72 7.029,54.577 7.029,53.989 2.869,49.829 2.869,24.169 7.842,19.196 7.99,19.344 9.91,19.344 12.781,16.473 28.577,16.473 32.169,20.065 32.169,21.481 30.95,22.7 IC9.22@30.95,26.55
EDGE1_DIO7: IC9.23 J15.10 R32.1 | length 86.9
  Top w0.127: v1(6.7,60.1) 7.3,59.5 v1(10,59.5)
  Bot w0.127: J15.10@4,59.3 6.3,59.3 6.7,59.7 v1(6.7,60.1) ; R32.1@10.715,59.5 v1(10,59.5) 10,57.686 9.7,57.386 7.64,57.386 7.139,56.885 7.139,54.825 7.359,54.606 7.359,53.659 3.199,49.499 3.199,24.499 8.1,19.598 10.016,19.598 12.813,16.8 28.442,16.8 31.842,20.2 31.842,21.308 30.45,22.7 IC9.23@30.45,26.55
EDGE2_DIO0: IC1.2 J16.1 R5.1 | length 59.9
  Top w0.127: v1(34.859,13.5) 34.95,13.409 40.909,13.409 J16.1@41,13.5
  Bot w0.127: R5.1@30.376,51.7 30.545,51.531 30.545,51.076 30.654,50.967 30.654,49.404 30.545,49.295 30.545,47.895 IC1.2@30.4,47.75 30.4,47.175 30.56,47.016 30.56,46.946 31.749,45.757 32.672,45.757 32.926,45.503 33.566,45.503 33.608,45.461 34.39,45.461 34.794,45.057 35.193,45.057 35.205,45.045 40.026,45.045 40.33,44.741 40.859,44.741 41.168,45.049 41.532,45.049 42.294,44.287 42.294,43.468 42.975,42.787 42.975,38.029 42.721,37.775 42.721,20.499 39.922,17.7 37.929,17.7 34.859,14.63 v1(34.859,13.5)
EDGE2_DIO1: IC1.3 J16.2 R7.1 | length 61.2
  Top w0.127: v1(35.3,11.5) 35.347,11.452 40.952,11.452 J16.2@41,11.5
  Bot w0.127: R7.1@31.476,51.7 30.9,51.124 30.9,51.08 30.908,51.072 30.908,47.758 IC1.3@30.9,47.75 30.9,47.175 31.059,47.016 31.059,46.946 31.995,46.011 32.777,46.011 33.031,45.757 33.672,45.757 33.713,45.715 34.495,45.715 34.899,45.311 35.298,45.311 35.31,45.299 40.132,45.299 40.436,44.995 40.754,44.995 41.062,45.303 41.638,45.303 42.548,44.392 42.548,43.573 43.229,42.892 43.229,37.924 43.007,37.702 43.007,20.351 40.049,17.393 38.057,17.393 35.3,14.636 35.3,13.682 35.3,13.318 v1(35.3,11.5)
EDGE2_DIO2: IC1.5 J16.3 R9.1 | length 65.3
  Top w0.127: v1(35.5,9.9) 35.94,9.46 40.96,9.46 J16.3@41,9.5 38,9.5
  Bot w0.127: R9.1@32.576,51.7 31.9,51.024 IC1.5@31.9,47.75 31.9,47.175 32.059,47.016 32.059,46.946 32.741,46.265 32.882,46.265 33.136,46.011 33.777,46.011 33.819,45.969 34.6,45.969 35.004,45.565 35.403,45.565 35.415,45.553 40.237,45.553 40.541,45.249 40.649,45.249 40.957,45.557 41.743,45.557 42.802,44.497 42.802,43.679 43.483,42.997 43.483,35.039 43.279,34.835 43.279,20.238 40.162,17.121 38.169,17.121 35.554,14.505 35.554,13.788 35.554,13.212 ; v1@35.554,9.9 35.554,11.131 35.74,11.318 35.74,11.682 35.554,11.869 35.554,13.212
EDGE2_DIO3: IC1.6 J16.4 R11.1 | length 60.2
  Top w0.127: v1(35.994,7.6) 36.135,7.459 40.96,7.459 J16.4@41,7.5
  Bot w0.127: IC1.6@32.4,47.75 32.4,47.175 32.56,47.016 32.56,46.946 33.241,46.265 33.882,46.265 33.924,46.223 34.705,46.223 35.109,45.819 35.508,45.819 35.516,45.811 41.848,45.811 43.056,44.603 43.056,43.784 43.737,43.103 43.737,20.213 40.304,16.779 38.311,16.779 35.808,14.276 35.808,13.893 35.808,13.107 35.808,11.974 35.994,11.788 35.994,11.212 35.808,11.026 35.808,10.215 35.994,10.029 v1(35.994,7.6) R11.1@35.2,7.6
EDGE2_DIO4: IC1.8 J16.7 R13.1 | length 54.6
  Top w0.127: v1(36.338,12.619) 37.064,11.893 v1(38.5,11.893)
  Bot w0.127: IC1.8@33.4,47.75 33.4,47.175 33.56,47.016 33.56,46.946 34.029,46.477 34.811,46.477 35.215,46.073 35.614,46.073 35.622,46.065 41.953,46.065 43.31,44.708 43.31,43.889 43.991,43.208 43.991,20.033 40.431,16.472 38.409,16.472 36.062,14.125 36.062,13.3 36.062,13.232 36.338,12.956 v1(36.338,12.619) ; R13.1@37.8,11.34 37.8,11.355 38.338,11.893 v1(38.5,11.893) 38.893,11.5 J16.7@41,11.5
EDGE2_DIO5: IC1.9 J16.8 R15.1 | length 56.8
  Top w0.127: v1(36.502,9.9) 36.543,9.94 v1(38.553,9.94)
  Bot w0.127: IC1.9@33.9,47.75 33.9,47.175 34.059,47.016 34.059,46.946 34.275,46.731 34.916,46.731 35.32,46.327 35.719,46.327 35.727,46.319 42.058,46.319 43.564,44.813 43.564,44.059 44.245,43.377 44.245,19.852 40.558,16.165 38.461,16.165 36.84,14.544 36.84,12.31 36.502,11.972 v1(36.502,9.9) ; R15.1@37.8,9.37 38.47,9.37 38.553,9.453 38.553,9.9 38.953,9.5 J16.8@41,9.5
EDGE2_DIO6: IC1.11 J16.9 R17.1 | length 58.3
  Top w0.127: v1(36.9,7.9) 36.778,7.9 36.767,7.911 v1(38.45,7.911)
  Bot w0.127: IC1.11@34.9,47.75 34.9,47.175 35.059,47.016 35.059,46.946 35.425,46.581 35.824,46.581 35.832,46.573 42.164,46.573 43.818,44.918 43.818,44.164 44.505,43.477 44.505,19.73 40.67,15.895 38.55,15.895 37.094,14.439 37.094,12.205 36.756,11.867 36.756,10.269 36.943,10.082 36.943,9.718 36.756,9.531 36.756,8.9 36.9,8.756 v1(36.9,7.9) 36.67,7.67 R17.1@36.67,6.7 ; v1(38.45,7.911) 38.861,7.5 J16.9@41,7.5
EDGE2_DIO7: IC1.12 J16.10 R18.1 | length 58.3
  Bot w0.127: IC1.12@35.4,47.75 35.4,47.175 35.56,47.016 35.56,46.946 35.671,46.835 35.929,46.835 35.937,46.827 42.269,46.827 44.072,45.023 44.072,44.269 44.759,43.582 44.759,19.625 40.775,15.641 38.655,15.641 37.348,14.334 37.348,12.1 37.162,11.914 37.162,10.222 37.197,10.188 37.197,9.612 37.162,9.578 37.162,8.26 37.34,8.082 37.34,7.718 37.162,7.539 37.162,5.648 37.31,5.5 J16.10@41,5.5
EDGE3_DIO0: IC1.13 J5.1 R21.1 | length 28
  Top w0.127: v1(37.4,67.1) 37.6,67.3 J5.1@41,67.3
  Bot w0.127: IC1.13@35.9,47.75 35.9,51.5 37.416,53.015 37.416,54.867 36.2,56.083 36.2,56.1 34.159,58.141 34.159,66.749 34.41,67 37.3,67 v1(37.4,67.1)